# Altium PCB SHT40.PcbDoc
Units mil, origin at the board's own origin, x right, y up, seen from the top; angles counter-clockwise.
Board outline 1320 x 680 mil, 2 copper layers (Top Layer, Bottom Layer); 10 components, 6 nets, 29 pads, 16 vias.
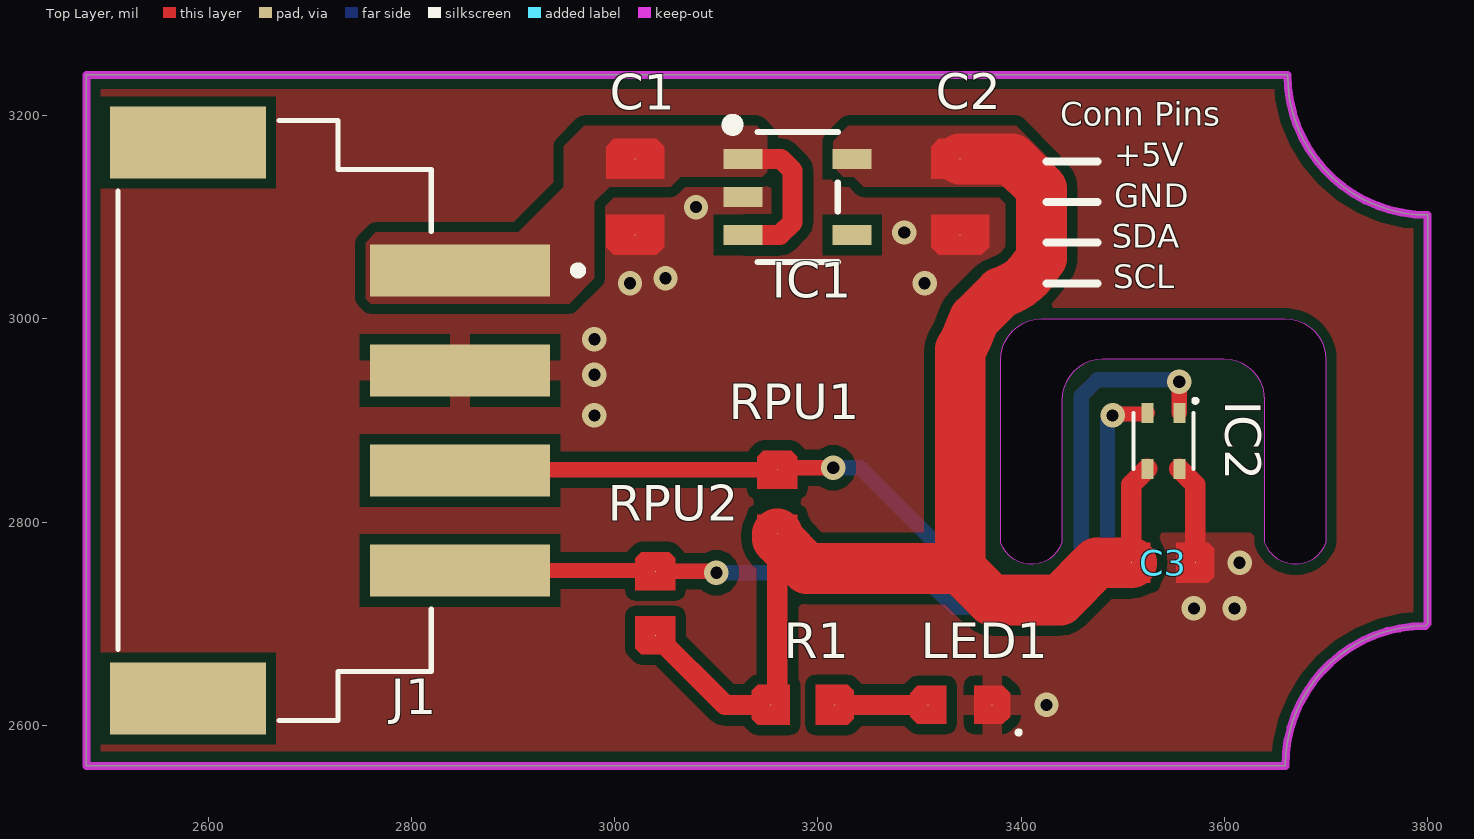
[diagram p0: Top Layer view]
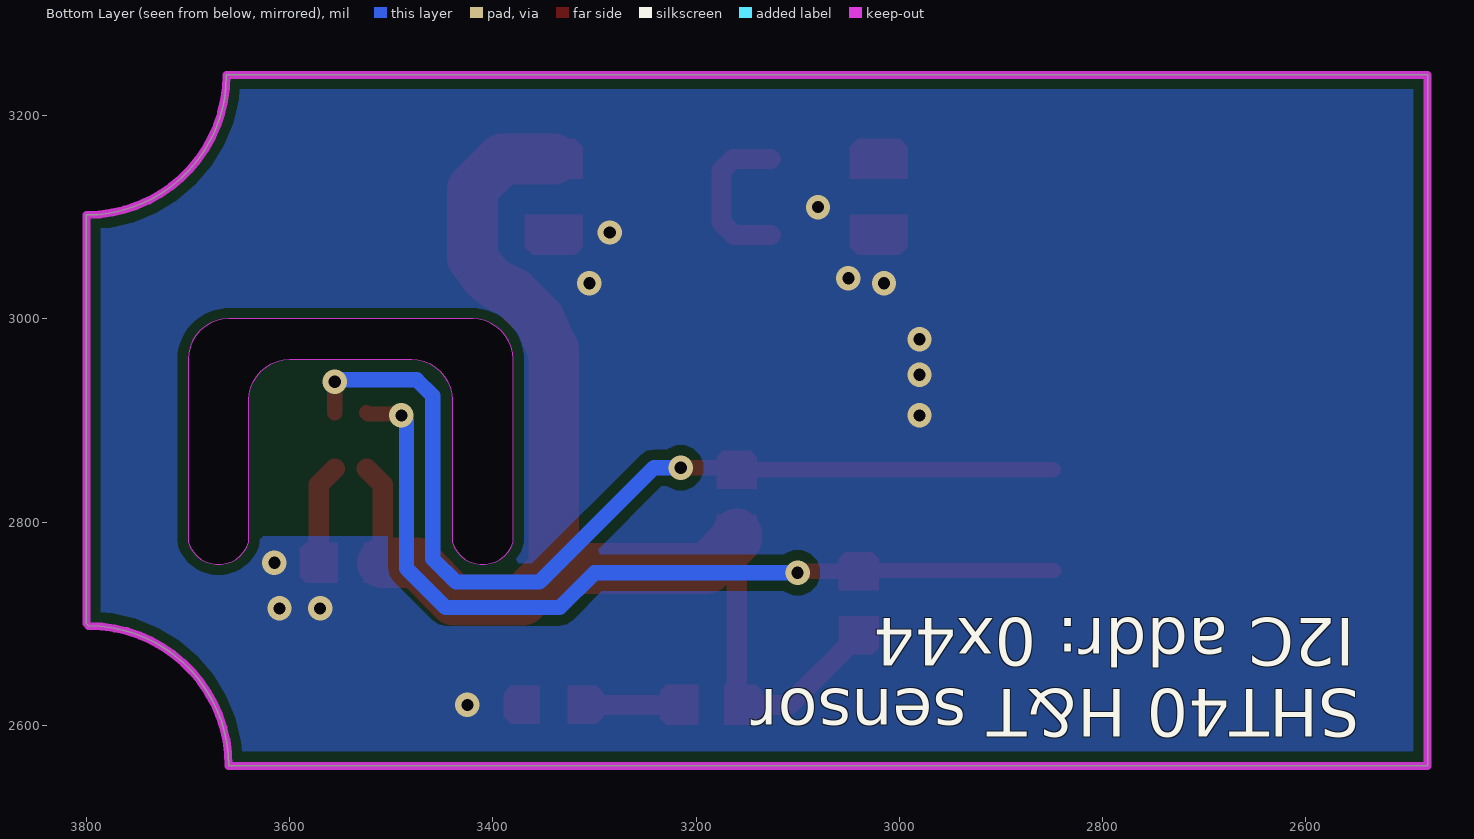
[diagram p1: Bottom Layer view, seen from below]
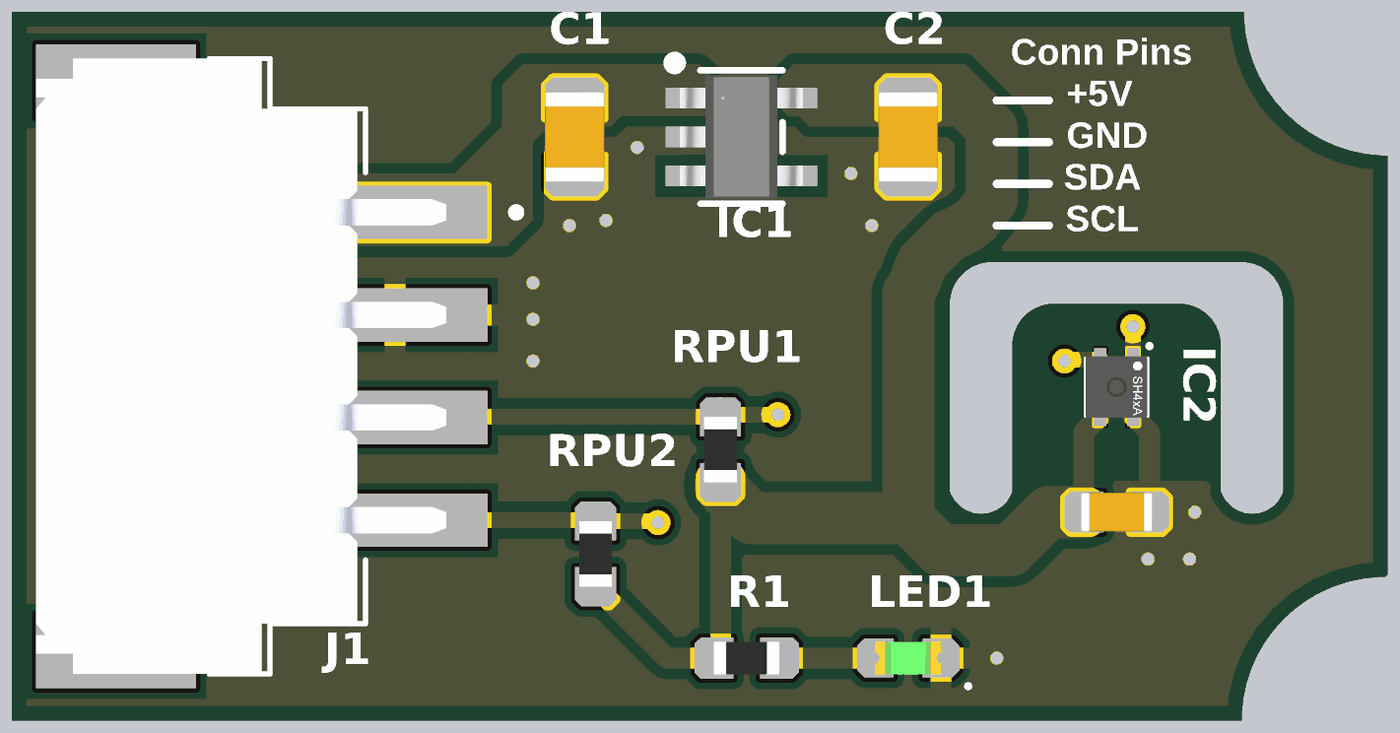
[diagram p2: 3D render of the assembled board from above, using the file's embedded part models]

## Layer stack, top to bottom
Top Solder: solder mask 0.4, Solder Resist, Dk 3.5
Top Layer: signal copper 1.4
Dielectric 1: dielectric 12.6, FR-4, Dk 4.8
Bottom Layer: signal copper 1.4
Bottom Solder: solder mask 0.4, Solder Resist, Dk 3.5

## Board outline
2480,2560 3660,2560 cw(c3797.8,2560) 3797.8,2697.8 3800,2700 3800,3102.2 cw(c3800,3240) 3662.2,3240 2480,3240
cut-out: 3440,2780 cw(c3410,2790) 3380,2780 3380,2960 cw(c3420,2960) 3420,3000 3660,3000 cw(c3660,2960) 3700,2960 3700,2780 cw(c3670,2790) 3640,2780 3640,2920 ccw(c3600,2920) 3600,2960 3480,2960 ccw(c3480,2920) 3440,2920

## Design rules (kind name [scope] priority, off if disabled: settings)
Clearance [All] p1: gap=10 ignorepadtopadclearanceinfootprint=FALSE except(0: Arc-Hole Track-Hole SMDPad-Hole THPad-Hole Via-Hole Fill-Hole Poly-Hole Region-Hole Text-Hole; 5: SMDPad-Via)
MinimumSolderMaskSliver [All] p1: minsoldermaskwidth=5
PolygonConnect PolygonConnect_3 [InComponentClass('Releif_connect') vs InNet('GND')] p1: connectstyle=Relief reliefconductorwidth=20 reliefentries=4 polygonreliefangle="90 Angle" airgapwidth=10
PolygonConnect PolygonConnect_2 [InNet('GND')] p2: connectstyle=Direct reliefconductorwidth=10 reliefentries=4 polygonreliefangle="90 Angle" airgapwidth=10
PolygonConnect PolygonConnect_1 [InNet('VCC-3V3')] p3: connectstyle=Direct reliefconductorwidth=10 reliefentries=4 polygonreliefangle="90 Angle" airgapwidth=10
PolygonConnect [InNet('VCC-5V')] p4: connectstyle=Direct reliefconductorwidth=10 reliefentries=4 polygonreliefangle="90 Angle" airgapwidth=10
RoutingVias [All] p1: holewidth=12 width=24 viastyle="Through Hole" minholewidth=12 minwidth=24 maxholewidth=12 maxwidth=24
SilkToSolderMaskClearance [IsPad] p1: minsilkscreentomaskgap=5 clearancetoexposedcopper=TRUE
SolderMaskExpansion [All] p1: expansion=4 istentingtop=FALSE
Width [All] p1: maxlimit=50 minlimit=10 preferedwidth=15
28 further rules are at their usual default settings.

## Classes and differential pairs
component class Releif_connect: J1 LED1

## Components (designator, comment, footprint, x,y, rotation, side; value= is the part's Value field where it differs from the comment)
C1 "4.7uF" CAP_0805 3020,3120 r90 top
C2 "4.7uF" CAP_0805 3340,3120 r90 top
C3 "100nF" CAP_0603 3540,2760 r180 top
IC1 "TLV75533PDBVR" SOT23_5 3180,3120 r0 top
IC2 "SHT40-AD1F-R2" SHT4X 3540,2880 r270 top
J1 "S4B-XH-SM4-TB" JST_S4B-XH-SM4-TB 2580,2900 r270 top
LED1 "GREEN LED" DIOC1608X04N 3340,2620 r0 top
R1 "1Kohm" RES_0603 3185,2620 r180 top
RPU1 "10kOhm" RES_0603 3160,2820 r270 top
RPU2 "10kOhm" RES_0603 3040,2720 r270 top

## Footprints (in the part's own frame and the unit in brackets; to place one, negate y for a bottom-side part, rotate by r counter-clockwise, add the part's x,y. Pads: shape width x height; smd on the part's side, far side on the other; paste and mask are expansions set on the pad)
CAP_0603 [mil] "Chip Capacitor, 2-Leads, Body 1.60x0.80mm, IPC Medium Density"
  round 1 smd: 1(-31.5,0) 2(31.5,0)
  Top Layer region: 12.8,-19.69 12.8,19.69 44.31,19.69 50.2,13.8 50.2,-13.8 44.31,-19.69
  Top Layer region: -50.2,-13.8 -50.2,13.8 -44.31,19.69 -12.8,19.69 -12.8,-19.69 -44.31,-19.69
  body extent -34,-19 34,19, height 31
CAP_0805 [mil] "Chip Capacitor, 2-Leads, Body 2.00x1.25mm, IPC Medium Density"
  round 1 smd: 1(-37.4,0) 2(37.4,0)
  Top Layer region: -57.09,-20.91 -57.09,20.91 -49.46,28.54 -17.72,28.54 -17.72,-28.54 -49.46,-28.54
  Top Layer region: 17.72,-28.54 17.72,28.54 49.46,28.54 57.09,20.91 57.09,-20.91 49.46,-28.54
  body extent -43,-29 43,29, height 24
DIOC1608X04N [mil] "Chip Diode, 2-Leads, Body 1.60x0.80mm, IPC Medium Density"
  round 1 smd: 1(-31.5,0) 2(31.5,0)
  Top Layer region: 13.78,-18.7 42.13,-18.7 49.21,-11.61 49.21,11.61 42.13,18.7 13.78,18.7
  Top Layer region: -49.21,-11.61 -42.13,-18.7 -13.78,-18.7 -13.78,18.7 -42.13,18.7 -49.21,11.61
  silkscreen extent 56,-29 60,-25, body extent -31,-16 31,16, height 31
JST_S4B-XH-SM4-TB [mm]
  rect 1.3x4.5 smd: 1(-3.75,6.8) 2(-1.25,6.8) 3(1.25,6.8) 4(3.75,6.8)
  rect 1.8x3.9 smd: SH1(-6.95,0) SH2(6.95,0)
  silkscreen extent -7.5,-1.75 7.5,9.85, body extent -7.5,-1.95 7.5,8.05, height 6.12
RES_0603 [mil] "Chip Resistor, 2-Leads, Body 1.60x0.80mm, IPC Medium Density"
  round 1 smd: 1(-31.5,0) 2(31.5,0)
  Top Layer region: 12.8,-19.69 12.8,19.69 44.31,19.69 50.2,13.8 50.2,-13.8 44.31,-19.69
  Top Layer region: -50.2,-13.8 -50.2,13.8 -44.31,19.69 -12.8,19.69 -12.8,-19.69 -44.31,-19.69
  body extent -31,-16 31,16, height 18
SHT4X [mm]
  rect 0.5x0.3 smd mask+0.051: 1(-0.7,0.4) 2(-0.7,-0.4) 3(0.7,-0.4) 4(0.7,0.4)
  silkscreen extent -1.05,-0.75 0.7,0.85, body extent -0.75,-0.75 0.75,0.75, height 0.54
SOT23_5 [mil]
  rect 38.28x20 smd paste+0 mask+0: 1(-53.64,37.4) 2(-53.64,0) 3(-53.64,-37.4) 4(53.64,-37.4) 5(53.64,37.4)
  silkscreen extent -65,-64 40,72, body extent -59,-59 59,59, height 57

## Part data
C1 C2: library part C000003, "4.7 µF ±10% 25V Ceramic Capacitor X5R 0805 (2012 Metric)", DigiKey Part Number=399-C0805C475K3PACTUCT-ND, JLCPCB Part Number=C1779, Manufacturer Product Number=C0805C475K3PACTU, capacitance=4.7uF, ComponentLink1Description=DigiKey, ComponentLink1URL=https://www.digikey.com/en/products/detail/kemet/C0805C475K3PAC7800/1950665
C3: library part C000007, "0.1 µF ±10% 25V Ceramic Capacitor X7R 0603 (1608 Metric)", DigiKey Part Number=478-KAM15AR71E104KTCT-ND, JLCPCB Part Number=C1590, Manufacturer Product Number=KAM15AR71E104KT, capacitance=100nF, ComponentLink1Description=DigiKey, ComponentLink1URL=https://www.digikey.com/en/products/detail/kyocera-avx/06033C104K4T2A/8019250
IC1: "Linear Voltage Regulator IC Positive Fixed 1 Output 500mA SOT-23-5", DigiKey Part Number=296-50411-1-ND, JLCPCB Part Number=C404027, Mouser Part Number=595-TLV75533PDBVR, ComponentLink1Description=DigiKey, ComponentLink1URL=https://www.digikey.com/en/products/detail/texas-instruments/TLV75533PDBVR/9356541, ComponentLink2Description=Mouser, ComponentLink2URL=https://eu.mouser.com/ProductDetail/Texas-Instruments/TLV75533PDBVR?qs=55YtniHzbhAKEwqeO2xJXQ%3D%3D, Manufacturer Product Number=TLV75533PDBVR
IC2: "Humidity, Temperature 0 ~ 100% RH I2C ±1.8% RH 4 s Surface Mount", DigiKey Part Number=1649-SHT40-AD1F-R2CT-ND, JLCPCB Part Number=C7461846, Mouser Part Number=403-SHT40-AD1F-R2, ComponentLink1Description=DigiKey, ComponentLink1URL=https://www.digikey.com/en/products/detail/sensirion-ag/SHT40-AD1F-R2/17180863?s=N4IgTCBcDaIMoAkAqAWADAWgIIBECMAYhgEoQC6AvkA, ComponentLink2Description=Mouser, ComponentLink2URL=https://eu.mouser.com/ProductDetail/Sensirion/SHT40-AD1F-R2?qs=rQFj71Wb1eVPr6MxV5k7AQ%3D%3D, Manufacturer Product Number=SHT40-AD1F-R2
J1: library part 00000018, "Connector Header Surface Mount, Right Angle 4 position 0.098\" (2.50mm)", DigiKey Part Number=455-2262-1-ND, JLCPCB Part Number=C161861, Mouser Part Number=306-S4BXHSM4TBLFSN, ComponentLink1Description=DigiKey, ComponentLink1URL=https://www.digikey.com/en/products/detail/jst-sales-america-inc/S4B-XH-SM4-TB/1651064, ComponentLink2Description=Mouser, ComponentLink2URL=https://eu.mouser.com/ProductDetail/JST-Commercial/S4B-XH-SM4-TBLFSN?qs=QpmGXVUTftFIPbbIXV0K6A%3D%3D, Manufacturer Product Number=S4B-XH-SM4-TB
LED1: library part 00000001, "LED GREEN DIFFUSED 0603 SMD", Supplier Part Number 1=Q65111A3964, ComponentLink1Description=Digikey, ComponentLink1URL=https://www.digikey.com/en/products/detail/ams-osram-usa-inc/LG-Q396-PS-35/5249855, Supplier 1=Avnet
R1: library part R000004, "RES 1K OHM 1% 1/10W 0603", ComponentLink1Description=digikey, ComponentLink1URL=https://www.digikey.com/en/products/detail/vishay-beyschlag-draloric-bc-components/MCT06030C1001FP500/2607821, resistance=1Kohm
RPU1 RPU2: library part R000001, "10 kOhms ±1% 0.125W, 1/8W Chip Resistor 0603 (1608 Metric) Anti-Sulfur Thin Film", DigiKey Part Number=MCT0603-10.0K-CFCT-ND, Manufacturer Product Number=MCT06030C1002FP500, ComponentLink1Description=DigiKey, ComponentLink1URL=https://www.digikey.com/en/products/detail/vishay-beyschlag-draloric-bc-components/MCT06030C1002FP500/1850440, resistance=10kOhm

## Via types
v1: diameter 24, hole 12, Top Layer to Bottom Layer, 16 vias

## Nets (pads, with @x,y where several pads share a name; then routed paths per layer and width w, separated by ;. In a path a pad name is that pad's centre, name@x,y a point inside that pad or via, vN(x,y) a via of type N, cw(c..) or ccw(c..) an arc to the next point about the centre after c; other vN are vias at no path point)
GND: C1.1 C2.1 C3.1 IC1.2 IC2.4 J1.2 LED1.2 | length 99
  Top Layer w20: IC2.4 3571.5,2836.69 C3.1
  other v1: 3425,2620 3570,2715 3610,2715 3615,2760 2980,2905 2980,2945 2980,2980 3015,3035 3305,3035 3050,3040 3285,3085 3080,3110
NetLED1_1: LED1.1 R1.1 | length 92
  Top Layer w20: R1.1 LED1.1
SCL: IC2.2 J1.4 RPU2.1 | length 856.4
  Top Layer w15: J1.4 3039.13,2752.36 RPU2.1 3098.5,2751.5 v1(3100,2750) ; v1(3490,2905) 3491.28,2906.28 3522.97,2906.28 IC2.2
  Bottom Layer w15: v1(3100,2750) 3300,2750 3334.12,2715.88 3446.58,2715.88 3485,2754.3 3485,2900 v1(3490,2905)
SDA: IC2.1 J1.3 RPU1.1 | length 979.7
  Top Layer w15: J1.3@2848.43,2851.5 RPU1.1 3162.01,2853.5 v1(3215,2853.5) ; 3147.8,2850.79 3160,2862.99 ; v1(3555.56,2938) 3555.65,2937.91 3555.65,2907.65 IC2.1
  Bottom Layer w15: v1(3215,2853.5) 3241.5,2853.5 3354.12,2740.88 3436.22,2740.88 3459.22,2763.88 3459.22,2924.36 3474.86,2940 3546.64,2940 3546.91,2939.72 3553.84,2939.72 v1(3555.56,2938)
VCC-3V3: C2.2 C3.2 IC1.5 IC2.3 R1.2 RPU1.2 RPU2.2 | length 1300.5
  Top Layer w20: RPU2.2 3108.5,2620 R1.2 3160,2626.5 3160,2783.58 ; C3.2 3508.5,2836.69 IC2.3
  Top Layer w50: RPU1.2 3160,2783.58 3189.29,2754.29 3340,2754.29 ; C2.2 3390.71,3157.4 3420,3128.11 3420,3059.74 3410.35,3046.55 cw(c3370,3076.08) 3392.51,3031.43 3388.43,3029.38 cw(c3366,3074.07) 3380,3026.07 3353.93,3000 3349.56,2989.57 3348.68,2986.94 cw(c3301.16,3002.47) 3345.75,2979.87 3344.29,2976.98 cw(c3299.69,2999.59) 3340,2970 3340,2754.29 ; C3.2 3474.77,2760 3438.15,2723.38 3370.91,2723.38 3340,2754.29
VCC-5V: C1.2 IC1.1 IC1.3 J1.1 | length 158
  Top Layer w20: IC1.3 3162.6,3082.6 3175,3095 3175,3145.69 3163.28,3157.4 IC1.1
pads on no net: IC1.4 J1.SH1 J1.SH2

## Polygon pours and split planes (outlines as drawn)
GND on Top Layer "GND_L01_P003" (solid, remove dead copper, pour order 3): 2480,3240 3790,3240 3805,3225 3805,2560 2480,2560
VCC-3V3 on Top Layer "VCC-3V3_L01_P002" (solid, pour order 2): 3215,3150 3215,3175 3230,3190 3395,3190 3430,3155 3430,3135 3425,3130 3245,3130 3235,3140 3225,3140
VCC-5V on Top Layer "VCC-5V_L01_P001" (solid, pour order 1): 2755,3020 2755,3075 2765,3085 2905,3085 2950,3130 2950,3170 2970,3190 3140,3190 3150,3180 3150,3145 3145,3140 3065,3140 3055,3130 2995,3130 2980,3115 2980,3040 2955,3015 2760,3015
GND on Bottom Layer "GND_L02_P004" (solid, remove dead copper, pour order 4): 2480,3240 3795,3240 3795,2565 2480,2565 2480,3235

## Keep-outs
Keep-Out Layer:
  lines w7.87: 3797.8,2697.8 ccw(c3797.8,2560) 3660,2560 2480,2560 2480,3240 3662.2,3240 ccw(c3800,3240) 3800,3102.2 3800,2700

## Other copper
Top Layer:
  pour cut-out: 3435.48,2771.27 3454.21,2790 3625.79,2790 3644.52,2771.27 3645,2771.74 3645,2965 3435,2965 3435.48,2964.52
Bottom Layer:
  pour cut-out: 3435.48,2767.89 3454.21,2786.63 3625.79,2786.63 3644.52,2767.89 3645,2768.37 3645,2961.63 3435,2961.63 3435.48,2961.15

## Silkscreen, mask and mechanical layers (free items; w line width, h text height)
Top Overlay:
  lines w7.87: 3425,3035 3475,3035 ; 3425,3075 3475,3075 ; 3425,3115 3475,3115 ; 3425,3155 3475,3155
  text "Conn Pins" at 3438.29,3182.2 h40
  text "+5V" at 3491.85,3142.44 h40
  text "GND" at 3491.78,3102.2 h40
  text "SDA" at 3489.17,3062.2 h40
  text "SCL" at 3490.79,3022.2 h40
Bottom Overlay:
  text "I2C addr: 0x44" at 2551.47,2720.6 h80 r180
  text "SHT40 H&T sensor" at 2546.92,2650.49 h80 r180

## Text inside footprints (layer, text, board x,y; h text height)
IC1: Mechanical 13 "*" at 3143,3129.4 h50